# Altium PCB Converter.PcbDoc
Units mm, origin at the board's own origin, x right, y up, seen from the top; angles counter-clockwise.
Board outline 40 x 15 mm, 2 copper layers (Top Layer, Bottom Layer); 18 components, 10 nets, 38 pads, 61 vias.
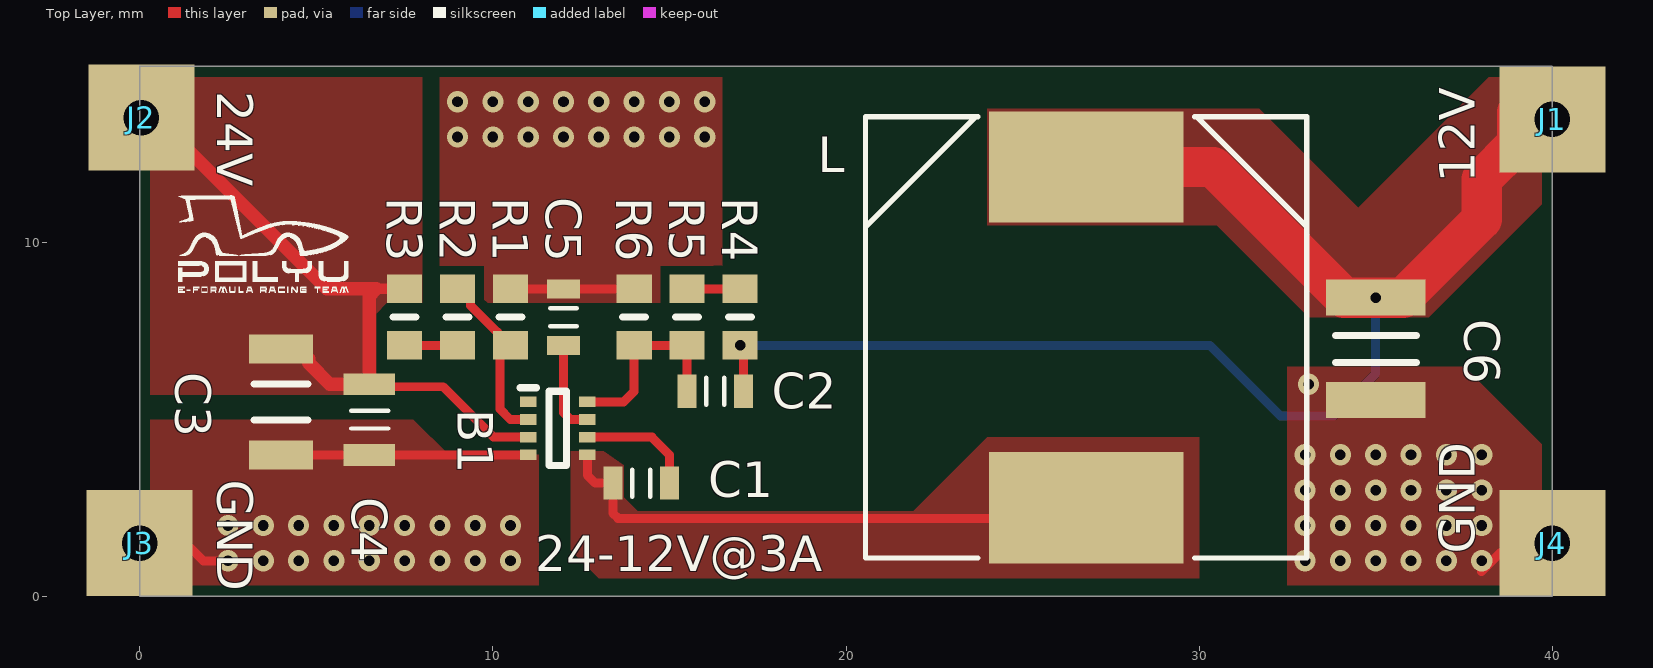
[diagram p0: Top Layer view]
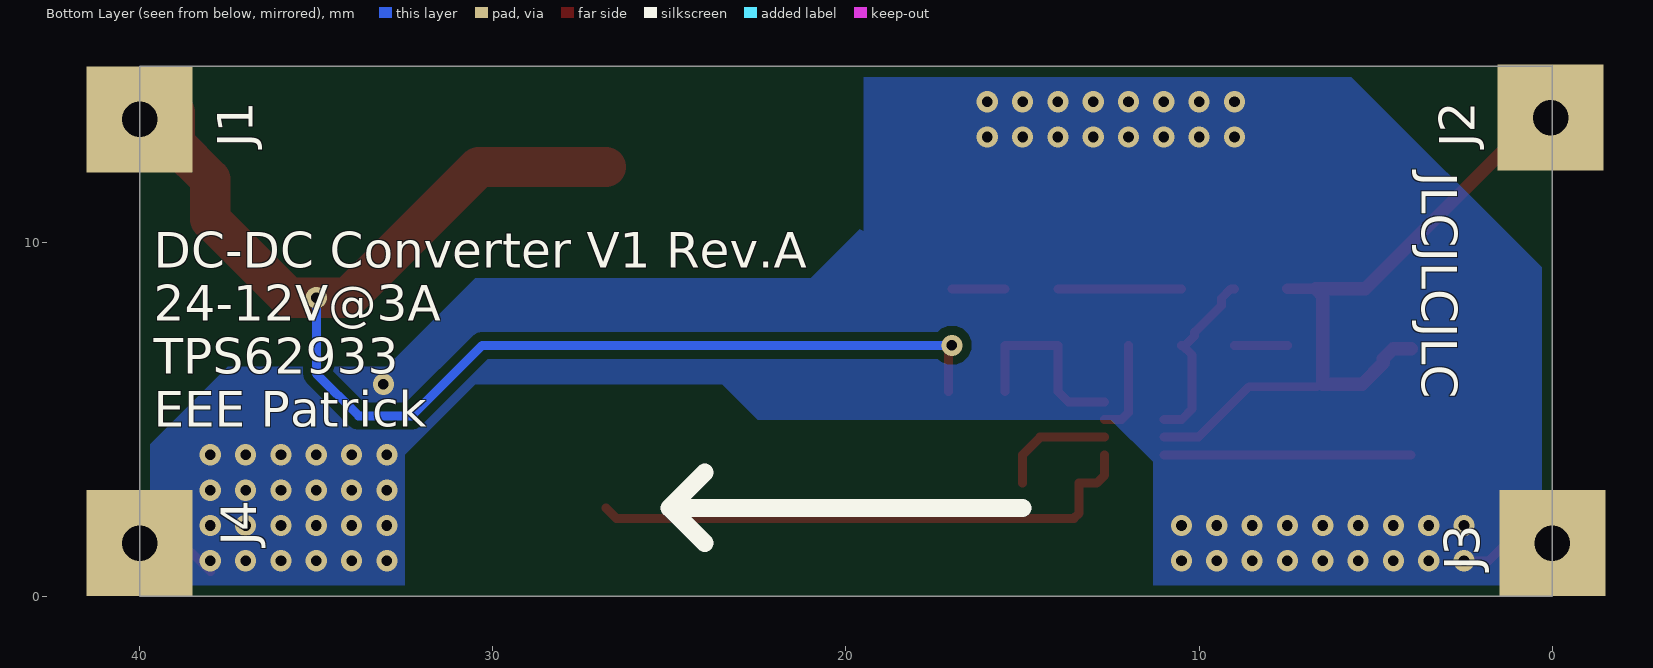
[diagram p1: Bottom Layer view, seen from below]

## Layer stack, top to bottom
Top Solder: solder mask 0.0102, Solder Resist, Dk 3.5
Top Layer: signal copper 0.0356
Dielectric 1: dielectric 0.32, FR-4, Dk 4.8
Bottom Layer: signal copper 0.0356
Bottom Solder: solder mask 0.0102, Solder Resist, Dk 3.5

## Board outline
0,0 0,15 40,15 40,0

## Design rules (kind name [scope] priority, off if disabled: settings)
BoardOutlineClearance [All] p1: gap=0.3 ignorepadtopadclearanceinfootprint=FALSE except(0: Arc-SplitContinuation Track-SplitContinuation SMDPad-SplitContinuation THPad-OutlineEdge THPad-CavityEdge THPad-CutoutEdge THPad-SplitBarrior THPad-SplitContinuation Via-OutlineEdge Via-CavityEdge Via-CutoutEdge Via-SplitBarrior Via-SplitContinuation Fill-SplitContinuation Poly-SplitContinuation Region-SplitContinuation Text-SplitContinuation)
Clearance [All] p1: gap=0.254 ignorepadtopadclearanceinfootprint=FALSE except(0: Arc-Hole Track-Hole SMDPad-Hole THPad-Hole Via-Hole Fill-Hole Poly-Hole Region-Hole Text-Hole; 0.127: Arc-Arc Arc-Track Track-Track SMDPad-SMDPad; 0.2: Arc-SMDPad Track-SMDPad; 0.5: SMDPad-THPad THPad-THPad THPad-Via)
HoleSize [All] p1: absolutevalues=TRUE maxlimit=6.3 minlimit=0.3 maxpercent=80.000 minpercent=20.000
HoleToHoleClearance [All] p1: gap=0.6 allowstackedmicrovias=TRUE
MinimumAnnularRing [All] p1: minimumring=0.13
PlaneConnect [InNetClass('Power')] p1: planeconnectstyle=Direct reliefexpansion=0.508 reliefentries=4 reliefconductorwidth=0.254 reliefairgap=0.254
PolygonConnect PowerPolygonConnect [InNetClass('Power') vs InNetClass('Power')] p1: connectstyle=Direct reliefconductorwidth=0.254 reliefentries=4 polygonreliefangle="90 Angle" airgapwidth=0.254
PolygonConnect [All] p2: connectstyle=Direct reliefconductorwidth=0.254 reliefentries=4 polygonreliefangle="90 Angle" airgapwidth=0.254
RoutingCorners [All] p1: cornerstyle=45-Degree minsetback=1.27 maxsetback=1.27
RoutingPriority [Not(InNetClass('Power'))] p1: routingpriority=1
RoutingVias [All] p1: holewidth=0.5 width=1 viastyle="Through Hole" minholewidth=0.3 minwidth=0.5 maxholewidth=1 maxwidth=1.27
SMDNeckDown [All] p1: percent=95.000
SMDToPlane [All] p1: distance=0
SilkToSilkClearance [All] p1: silktosilkclearance=0.127
SilkToSolderMaskClearance [IsPad] p1: minsilkscreentomaskgap=0.15 clearancetoexposedcopper=TRUE
SolderMaskExpansion [All] p1: expansion=0.038 istentingtop=FALSE
UnRoutedNet [All] p1: checkbadconnections=TRUE
ViasUnderSMD [All] p1: allowed=TRUE
Width PowerTraceWidth [InNetClass('Power')] p1: maxlimit=1.143 minlimit=0.254 preferedwidth=0.254
Width [InNetClass('All Nets')] p2: maxlimit=0.384 minlimit=0.127 preferedwidth=0.254
22 further rules are at their usual default settings.

## Classes and differential pairs
net class Power: 12V 24V GND

## Components (designator, comment, footprint, x,y, rotation, side; value= is the part's Value field where it differs from the comment)
B1 "TPS62933DRLR" SOT583_TPS62933 11.838,4.75 r0 top
C1 "100n" 0603_SMD_C 14.2,3.2 r180 top
C2 "47p" 0603_SMD_C 16.3,5.8 r0 top
C3 "10u" 1206_SMD_C 4,5.5 r90 top
C4 "100n" 0805_SMD_C 6.5,5 r90 top
C5 "33n" 0603_SMD_C 12,7.9 r270 top
C6 "47u" 1210_SMD_C 35,7 r90 top
J1 "CastellatedHoles" CastellatedHole#1 40,13.5 r0 top
J2 "CastellatedHoles" CastellatedHole#2 3.25,16.75 r0 top
J3 "CastellatedHoles" CastellatedHole#1 0,1.5 r0 top
J4 "CastellatedHoles" CastellatedHole#1 40,1.5 r0 top
L "15u" DR127_SMD_L 26.8,7.326 r270 top
R1 "68k" 0603_SMD_R 10.5,7.9 r90 top
R2 "1M" 0603_SMD_R 9,7.9 r90 top
R3 "330k" 0603_SMD_R 7.5,7.9 r270 top
R4 "130k" 0603_SMD_R 17,7.9 r270 top
R5 "10k" 0603_SMD_R 15.5,7.9 r90 top
R6 "10k" 0603_SMD_R 14,7.9 r270 top

## Footprints (in the part's own frame and the unit in brackets; to place one, negate y for a bottom-side part, rotate by r counter-clockwise, add the part's x,y. Pads: shape width x height; smd on the part's side, far side on the other; paste and mask are expansions set on the pad)
0603_SMD_C [mm]
  rect 0.54x0.94 smd: 1(-0.8,0) 2(0.8,0)
  silkscreen extent -0.25,-0.38 0.25,0.38, body extent -0.84,-0.42 0.76,0.38, height 0.9
0603_SMD_R [mm]
  rect 0.8x1 smd: 1(-0.8,0) 2(0.8,0)
  silkscreen extent 0,-0.33 0,0.33, body extent -0.77,-0.43 0.77,0.43, height 0.45
0805_SMD_C [mm]
  rect 0.62x1.47 smd: 1(-1,0) 2(1,0)
  silkscreen extent -0.25,-0.54 0.25,0.51, body extent -1,-0.63 1,0.63, height 1.45
1206_SMD_C [mm]
  rect 0.82x1.82 smd: 1(-1.5,0) 2(1.5,0)
  silkscreen extent -0.51,-0.76 0.51,0.76, body extent -1.58,-0.83 1.62,0.77, height 1.9
1210_SMD_C [mm]
  rect 1.02x2.82 smd: 1(-1.45,0) 2(1.45,0)
  silkscreen extent -0.38,-1.15 0.38,1.14, body extent -1.6,-1.25 1.6,1.25, height 2.8
CastellatedHole#1 [mm]
  rect 3x3 / inner round 1.524 / far side rect 3x3 hole 1: 1(0,0)
CastellatedHole#2 [mm]
  rect 3x3 / inner round 1.524 / far side rect 3x3 hole 1: 1(-3.203,-3.203)
DR127_SMD_L [mil]
  rect 124x217 smd: 1(-190,0) 2(190,0)
  silkscreen extent -246,-246 246,246
SOT583_TPS62933 [mm]
  rect 0.475x0.3 smd: 1(-0.838,0.75) 2(-0.838,0.25) 3(-0.838,-0.25) 4(-0.838,-0.75) 5(0.838,-0.75) 6(0.838,-0.25) 7(0.838,0.25) 8(0.838,0.75)
  silkscreen extent -1.07,-1.05 0.25,1.15, body extent -0.8,-1.05 0.8,1.05, height 0.6

## Part data
B1: "The TPS62933 is a high-efficiency, easy-to-use synchronous buck converter with a wide input voltage range of 3.8 V to 30 V", Manufacturer_Name="Texas Instruments", Mouser Part Number=595-TPS62933DRLR, Datasheet Link=https://www.ti.com/lit/ds/symlink/tps62933.pdf?ts=1626073394234, Geometry.Height=0.6mm, Manufacturer_Part_Number=TPS62933DRLR, Mouser Price/Stock=https://www.mouser.co.uk/ProductDetail/Texas-Instruments/TPS62933DRLR?qs=Rp5uXu7WBW9fv47wfQVntQ%3D%3D
C1 C2 C5: library part 0603_SMD_Capacitor, "0603 SMD Capacitor"
C3: library part 1206_SMD_Capacitor, "1206 SMD Capacitor"
C4: library part 0805_SMD_Capacitor, "0805 SMD Capacitor"
C6: library part 1210_SMD_Capacitor, "1210 SMD Capacitor"
L: library part DR127-150-R, "15ÂµH Shielded Wirewound Inductor 5.03A 24.7mOhm Nonstandard", Package="Nonstandard Coiltronics", Availability=Unavailable, MF=Coiltronics, MP=DR127-150-R, Price=None, SnapEDA_Link=https://www.snapeda.com/parts/DR127-150-R/Coiltronics/view-part/547540/?ref=snap
R1 R2 R3 R4 R5 R6: library part 0603_SMD_Resistor, "0603 SMD Resistor"

## Via types
v1: diameter 0.6, hole 0.3, Top Layer to Bottom Layer, tented both sides, 61 vias

## Nets (pads, with @x,y where several pads share a name; then routed paths per layer and width w, separated by ;. In a path a pad name is that pad's centre, name@x,y a point inside that pad or via, vN(x,y) a via of type N, cw(c..) or ccw(c..) an arc to the next point about the centre after c; other vN are vias at no path point)
12V: C2.2 C6.2 J1.1 L.1 R4.2 | length 39.9
  Top Layer w0.254: v1(17,7.1) 17.1,7 C2.2
  Top Layer w1.143: L.1 30.398,12.152 34.1,8.45 v1(35,8.45) 35.777,8.45 38,10.673 38,11.8 39,12.8 J1.1@39,13.7
  Bottom Layer w0.254: v1(17,7.1) 30.3,7.1 32.3,5.1 33.8,5.1 35,6.3 v1(35,8.45)
24V: B1.3 C3.2 C4.2 J2.1 R3.1 | length 18.7
  Top Layer w0.254: C4.2@6.68,5.928 8.593,5.928 10.021,4.5 B1.3
  Top Layer w0.304: 6.7,8.7 R3.1
  Top Layer w0.381: J2.1@1.3,12.9 1.3,12.7 5.3,8.7 6.7,8.7 6.5,8.5 C4.2 5.384,6 4.783,6.601 4.783,6.717 4.5,7 C3.2
GND: B1.4 C3.1 C4.1 C5.1 C6.1 J3.1 J4.1 R1.2 R6.1 | length 14
  Top Layer w0.254: J3.1@1.3,1.7 1.3,1.5 1.8,1 v1(2.5,1) ; C3.1 C4.1 B1.4 ; R1.2 R6.1 ; v1(38,1) 38,0.7 J4.1@39.1,1.8
  other v1: 3.5,1 4.5,1 5.5,1 6.5,1 7.5,1 8.5,1 9.5,1 10.5,1 33,1 34,1 35,1 36,1 37,1 2.5,2 3.5,2 4.5,2 5.5,2 6.5,2 7.5,2 8.5,2 9.5,2 10.5,2 33,2 34,2 35,2 36,2 37,2 38,2 33,3 34,3 35,3 36,3 37,3 38,3 33,4 34,4 35,4 36,4 37,4 38,4 33.1,6 9,13 10,13 11,13 12,13 13,13 14,13 15,13 16,13 9,14 10,14 11,14 12,14 13,14 14,14 15,14 16,14
NetB1_2: B1.2 R1.1 R2.2 | length 5.1
  Top Layer w0.254: R2.2 9.1,8.7 9.373,8.427 9.373,8.227 10.127,7.473 10.127,7.373 R1.1@10.4,7.1 ; R1.1 10.473,7.1 10.2,6.827 10.2,5.3 10.5,5 B1.2
NetB1_5: B1.5 C1.2 L.2 | length 15.8
  Top Layer w0.254: B1.5 12.676,3.424 12.9,3.2 C1.2 13.4,2.349 13.549,2.2 26.5,2.2 L.2
NetB1_6: B1.6 C1.1 | length 3.3
  Top Layer w0.254: B1.6 14.5,4.5 15,4 C1.1
NetB1_7: B1.7 C5.2 | length 2.7
  Top Layer w0.254: C5.2 12,5.2 12.2,5 B1.7
NetB1_8: B1.8 C2.1 R5.1 R6.2 | length 5.5
  Top Layer w0.254: B1.8 13.7,5.5 14,5.8 R6.2 R5.1 C2.1
NetR2_1: R2.1 R3.2 | length 1.5
  Top Layer w0.254: R3.2 R2.1
NetR4_1: R4.1 R5.2 | length 1.5
  Top Layer w0.254: R5.2 R4.1
pads on no net: B1.1

## Polygon pours and split planes (outlines as drawn)
12V on Top Layer "12V_L01_P008" (solid, pour order 8): 33.1,7.9 36.5,7.9 40,11.4 40,15 38.5,15 38,14.5 33.1,9.6
12V on Top Layer "12V_L01_P003" (solid, pour order 3): 24,10.5 24,13.8 31.7,13.8 36.5,9 36.5,7.9 33.1,7.9 30.5,10.5
GND on Top Layer "GND_L01_P007" (solid, pour order 7): 8.5,15 8.5,8.3 16.5,8.3 16.5,15
GND on Top Layer "GND_L01_P001" (solid, pour order 1): 0,0 0,5 7.75,5 8.75,4 11.3,4 11.3,0
NetB1_5 on Top Layer "NETB1_5_L01_P005" (solid, pour order 5): 12.2,4.2 12.2,1.3 13,0.5 30,0.5 30,4.5 24,4.5 21.9,2.4 14.1,2.4 13.7,2.8 13.7,3.7 13,4.2
GND on Top Layer "GND_L01_P004" (solid, pour order 4): 32.5,6.5 37.5,6.5 40,4 40,0 32.5,0
24V on Top Layer "24V_L01_P000" (solid, pour order 0): 0,15 0,5.7 5.5,5.7 6.7,5.7 6.7,8 7,8.3 8,8.3 8,15
GND on Bottom Layer "GND_L02_P002" (solid, pour order 2): 0,0 0,9 6,15 19.5,15 19.5,5 12.5,5 11.3,3.8 11.3,0
GND on Bottom Layer "GND_L02_P006" (solid, pour order 6): 19.5,5 22.5,5 23.5,6 30.5,6 32.5,4 32.5,0 40,0 40,4 37.5,6.5 33,6.5 30.5,9 21,9 19.5,10.5

## Silkscreen, mask and mechanical layers (free items; w line width, h text height)
Top Overlay:
  drawing of 30 lines, arcs and shapes, not listed
  text "24V" at 2.203,14.297 h1 r270
  text "12V" at 37.797,11.703 h1 r90
  text "GND" at 2.203,3.297 h1 r270
  text "GND" at 37.797,1.203 h1 r90
  text "24-12V@3A" at 11.203,0.703 h1
Bottom Overlay:
  lines w0.508: 15,2.5 25,2.5 ; 24,1.5 25,2.5 ; 24,3.5 25,2.5
  text "JLCJLCJLC" at 3.697,11.997 h1 r90
  text "DC-DC Converter V1 Rev.A / 24-12V@3A / TPS62933 / EEE Patrick" at 39.6,4.8 h1
Outline:
  the board outline again, w0.127